# EAGLE board panel-front (EAGLE 7.7.0)
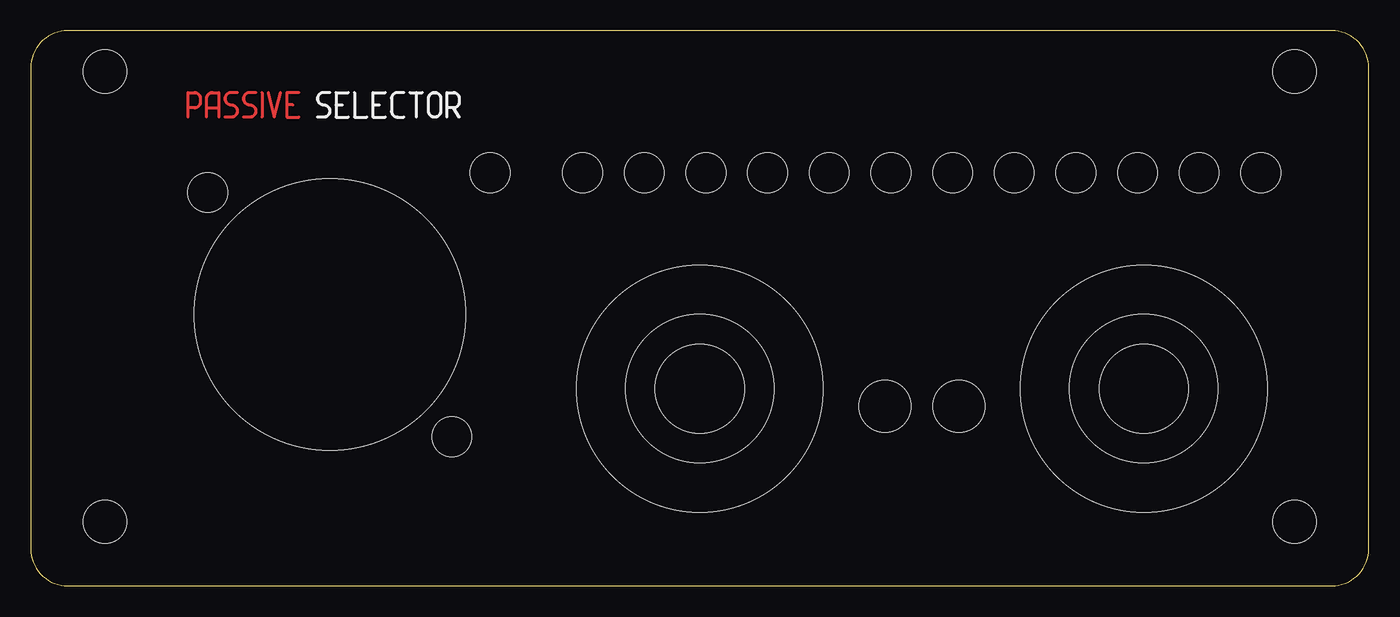
[diagram p0: board, top side]
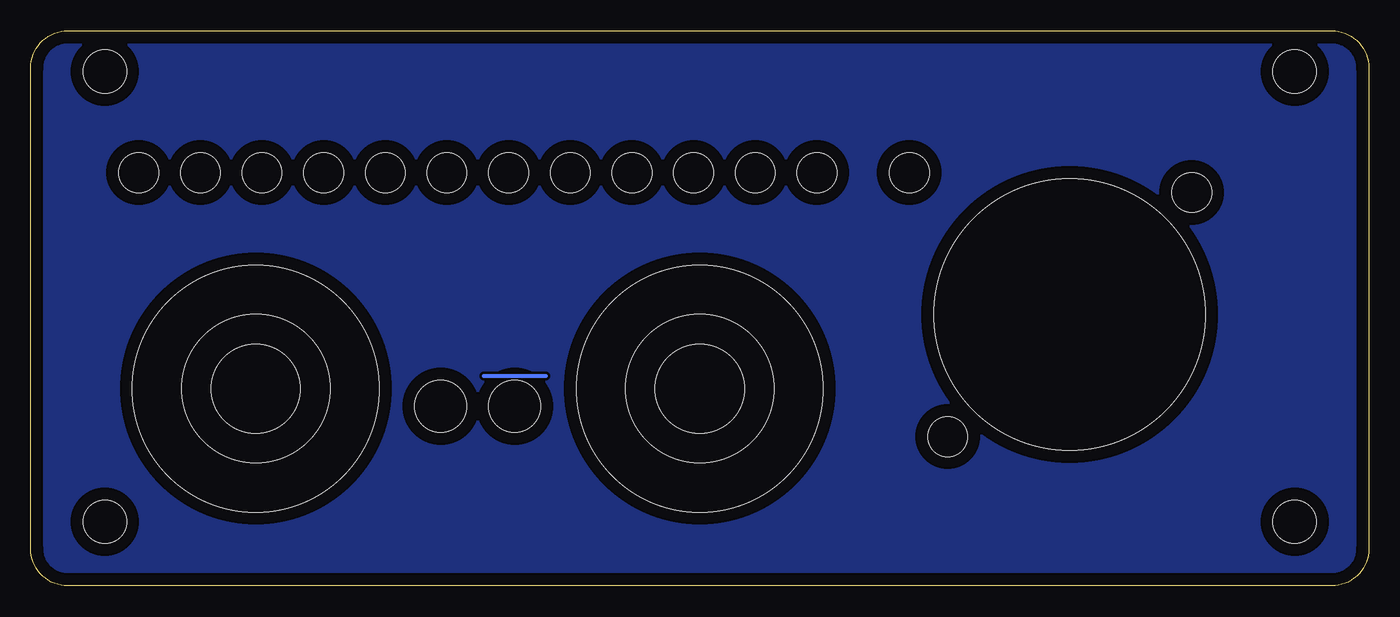
[diagram p1: board, bottom side, seen from below]

Size 108.5 x 45 mm. Coordinates in mm from the lower left corner, seen from the top.
Copper layers (1*16): Top 0.035mm / dielectric 1.5mm / Bottom 0.035mm
Design rules "default": minimum track width 10mil, minimum drill 24mil, track to track 8mil, track to pad 8mil, pad to pad 8mil, via to via 8mil, smd to smd 8mil, copper to edge 40mil, drill to drill 8mil, minimum pad ring 10mil, minimum via ring 8mil, stop-mask expansion 4mil, vias tented up to drill 0mil, thermal gap 10mil
Holes 22 mm at 24.25,22
Holes 3.2 mm at 34.15,12.1 14.35,31.9
Holes 7.2 mm at 54.25,16 90.25,16
Holes 20 mm at 54.25,16 90.25,16
Holes 4.2 mm at 69.25,14.55 75.25,14.55
Holes 12 mm at 54.25,16 90.25,16

## Footprints (pad centres in the part's own frame; a part is rotated, then mirrored left to right if it is on the bottom)
B3-SECTION = hole 3.5: 1.75,5.2; 98.25,5.2; 98.25,41.7; 1.75,41.7
LED-3MM = hole 3.2: 0,0

## Placement (x,y rotation side)
E$1  [B3-SECTION]  4.25,0 0 top
E$2  [LED-3MM]  84.75,33.5 180 top
E$3  [LED-3MM]  89.75,33.5 180 top
E$4  [LED-3MM]  94.75,33.5 180 top
E$5  [LED-3MM]  99.75,33.5 180 top
E$6  [LED-3MM]  74.75,33.5 180 top
E$7  [LED-3MM]  69.75,33.5 180 top
E$8  [LED-3MM]  64.75,33.5 180 top
E$9  [LED-3MM]  59.75,33.5 180 top
E$10  [LED-3MM]  54.75,33.5 180 top
E$11  [LED-3MM]  49.75,33.5 180 top
E$12  [LED-3MM]  79.75,33.5 180 top
E$13  [LED-3MM]  44.75,33.5 180 top
E$14  [LED-3MM]  37.25,33.5 180 top

## Library data of the parts
E$1-E$14 = enclosure

## Tracks (layer width: path | path; a pad name or v marks a point on that pad's centre or on a via)
S$1
  Bottom 0.305: 66.75,17 71.75,17
S$2
  Top 0.254: 12.75,38 12.75,38.75 | 12.75,38.75 12.75,40 13.25,40 arc-90 13.75,39.5 13.75,39.25 arc-90 13.25,38.75 12.75,38.75
S$3
  Top 0.254: 14.25,38 14.25,38.75 | 14.25,38.75 14.25,39.5 arc-90 14.75,40 15.25,40 15.25,38.75 | 15.25,38.75 15.25,38 | 14.25,38.75 15.25,38.75
S$4
  Top 0.254: 16.75,40 16.25,40 arc90 15.75,39.5 arc90 16.25,39 arc-90 16.75,38.5 arc-90 16.25,38 15.75,38
S$5
  Top 0.254: 18.25,40 17.75,40 arc90 17.25,39.5 arc90 17.75,39 arc-90 18.25,38.5 arc-90 17.75,38 17.25,38
S$6
  Top 0.254: 18.75,40 18.75,38
S$7
  Top 0.254: 19.25,40 19.75,38 20.25,40
S$8
  Top 0.254: 21.75,40 20.75,40 20.75,39 | 20.75,39 20.75,38 21.75,38 | 21.25,39 20.75,39
S$12
  pour Bottom: 0.25,45 108.25,45 108.25,0 0.25,0